# Altium PCB AC_Measurev2_250616.PcbDoc
Units mil, origin at the board's own origin, x right, y up, seen from the top; angles counter-clockwise.
Board outline 3503.94 x 2066.93 mil, 2 copper layers (Top Layer, Bottom Layer); 76 components, 57 nets, 383 pads, 23 vias.
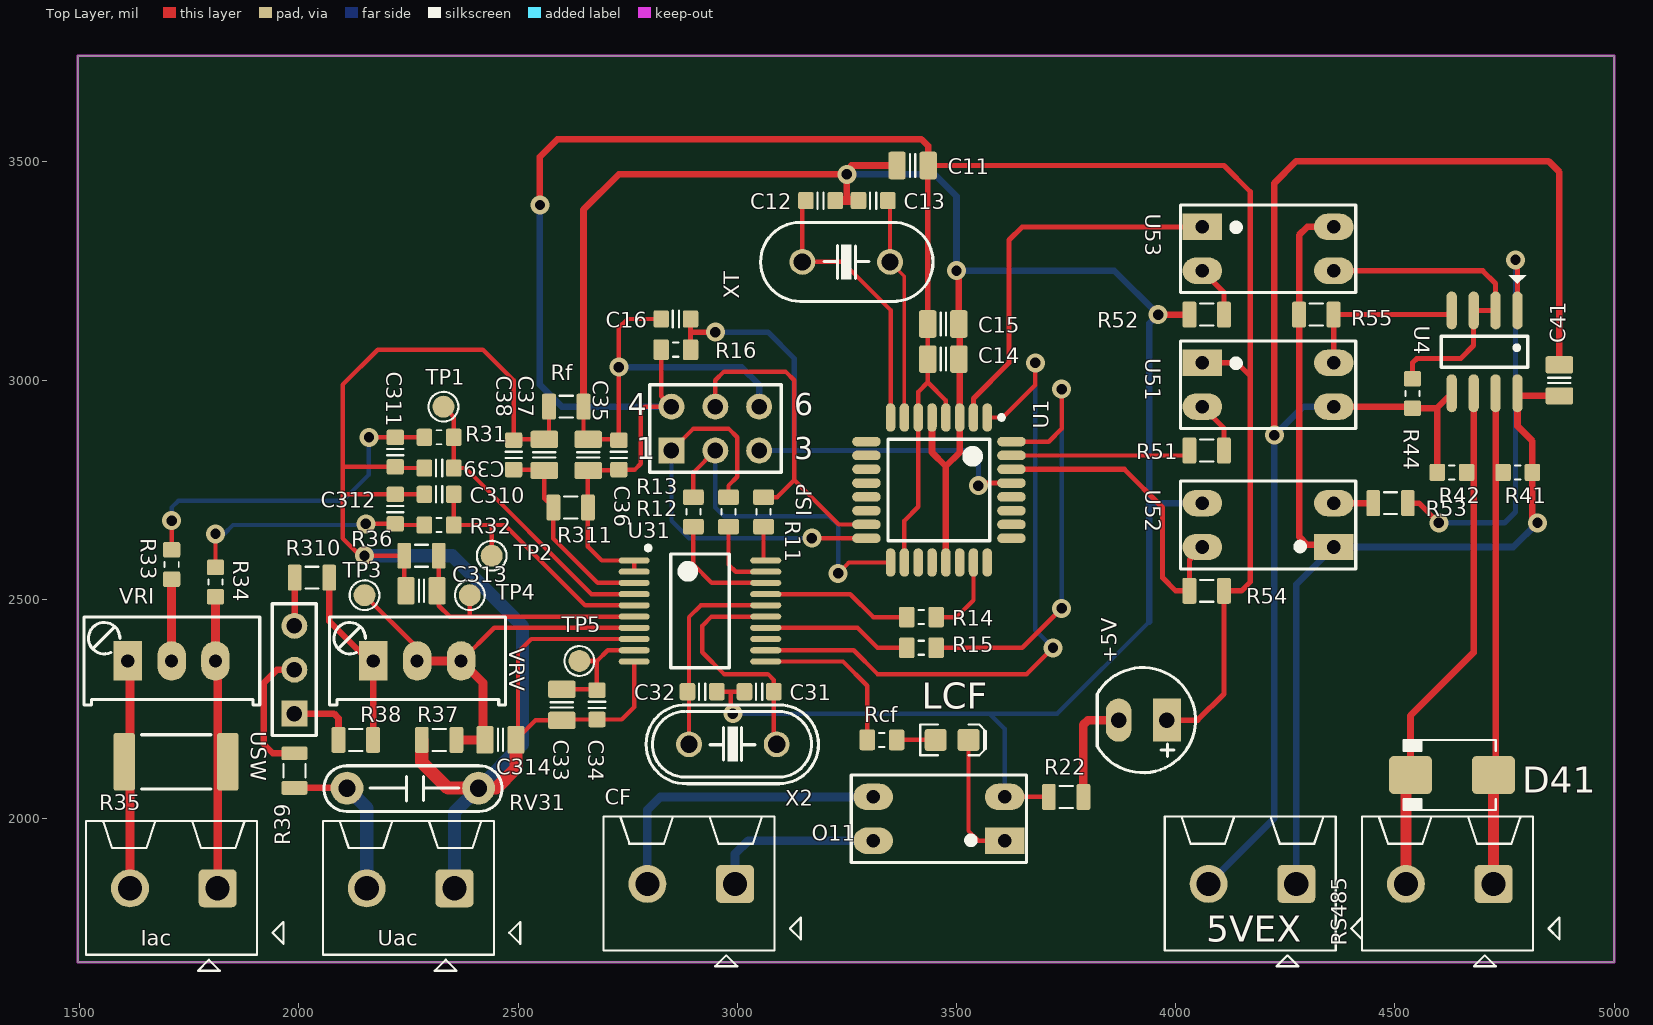
[diagram p0: Top Layer view]
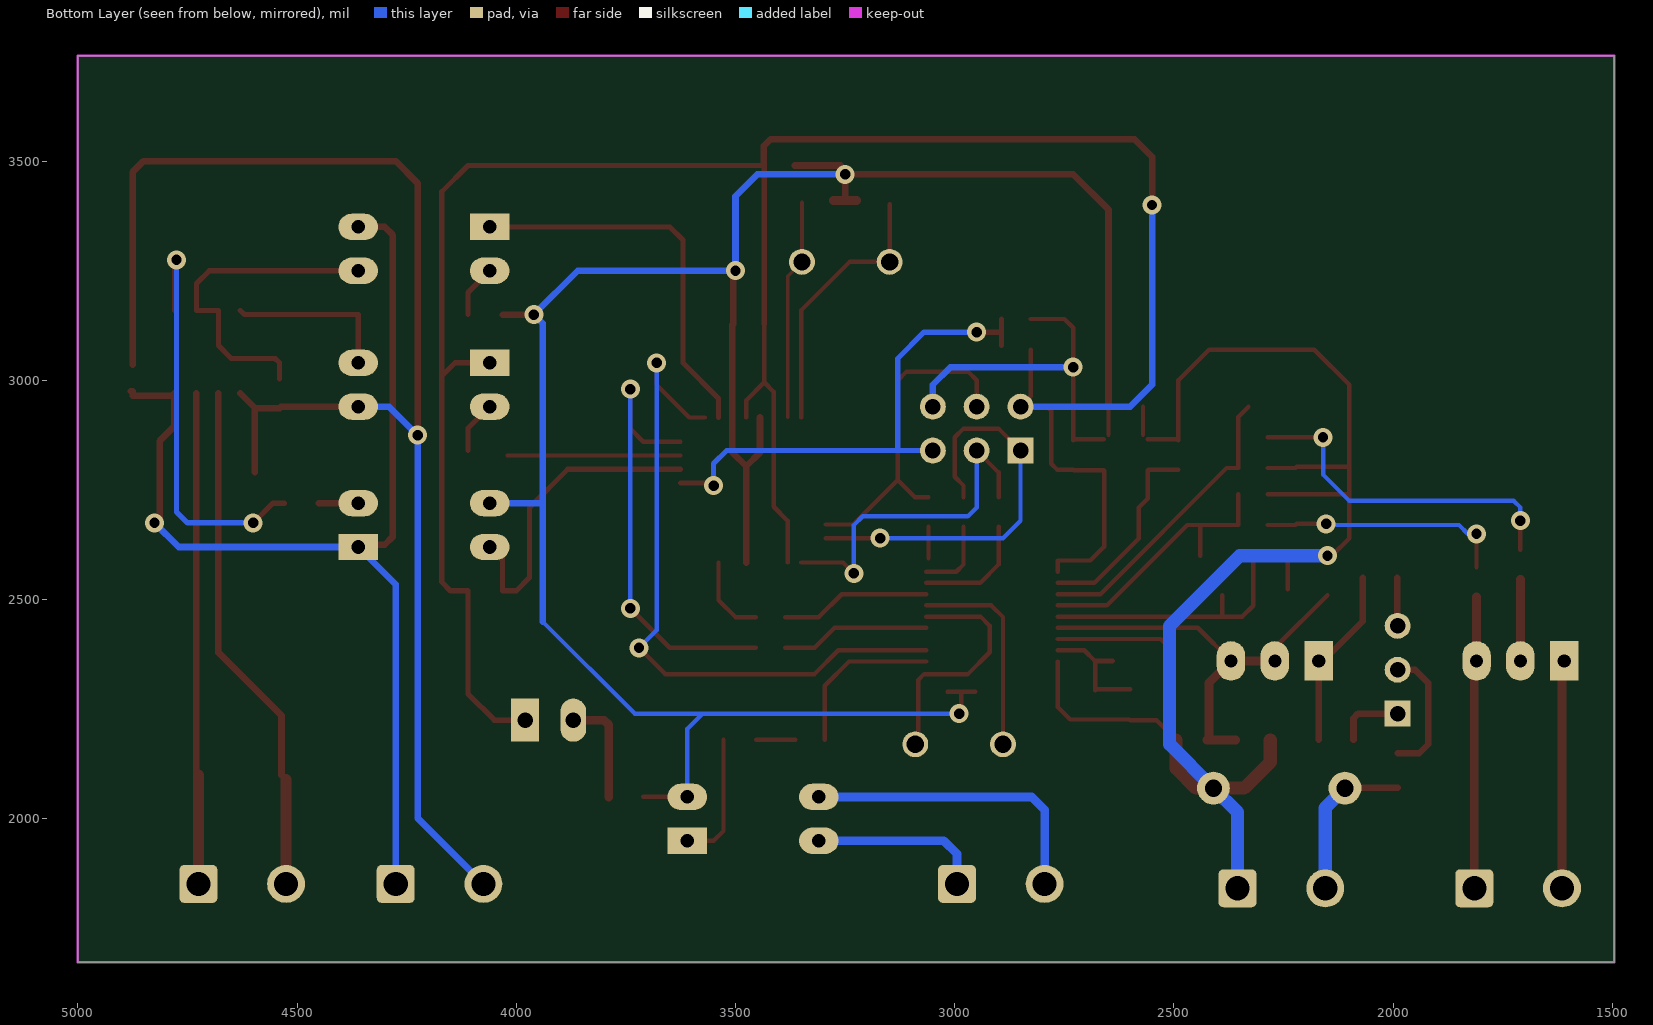
[diagram p1: Bottom Layer view, seen from below]
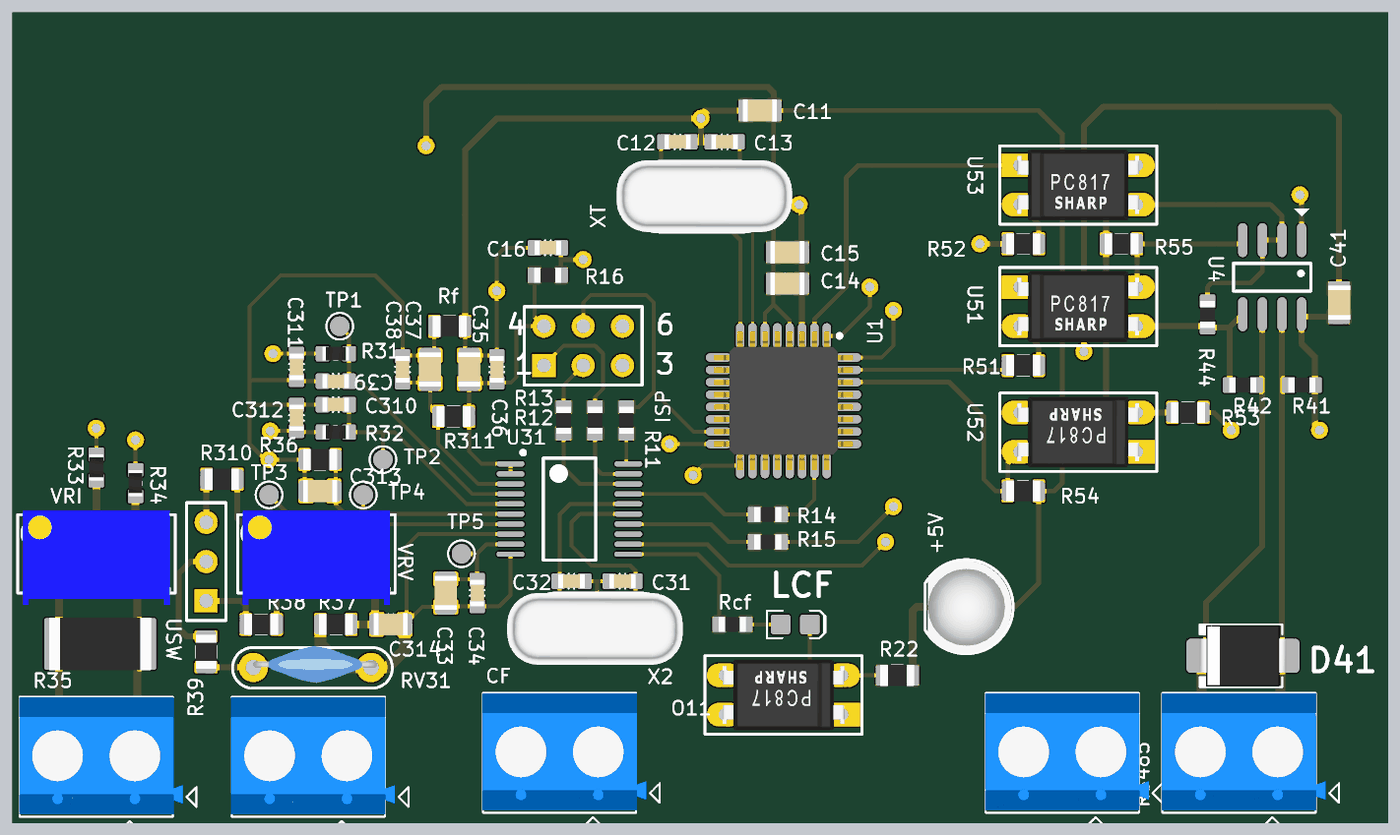
[diagram p2: 3D render of the assembled board from above, using the file's embedded part models]

## Layer stack, top to bottom
Top Solder: solder mask 0.4, Solder Resist, Dk 3.5
Top Layer: signal copper 1.4
Dielectric 1: dielectric 12.6, FR-4, Dk 4.8
Bottom Layer: signal copper 1.4
Bottom Solder: solder mask 0.4, Solder Resist, Dk 3.5

## Board outline
1496.06,1673.23 5000,1673.23 5000,3740.16 1496.06,3740.16

## Design rules (kind name [scope] priority, off if disabled: settings)
Clearance [All] p1: gap=10 except(8: Arc-SMDPad Track-SMDPad SMDPad-SMDPad; 20: Arc-Poly Track-Poly SMDPad-Poly THPad-Poly Via-Poly Fill-Poly Poly-Poly)
PlaneConnect [All] p1: planeconnectstyle=Direct reliefexpansion=20 reliefentries=4 reliefconductorwidth=10 reliefairgap=10
PolygonConnect [All] p1: connectstyle=Direct reliefconductorwidth=10 reliefentries=4 polygonreliefangle="90 Angle" airgapwidth=10
RoutingVias [All] p1: holewidth=31.5 width=47.24 viastyle="Through Hole" minholewidth=19.68 minwidth=43.31 maxholewidth=196.85 maxwidth=196.85
SolderMaskExpansion [All] p1: expansion=4
Width [All] p1: maxlimit=50 minlimit=8 preferedwidth=25
29 further rules are at their usual default settings.

## Components (designator, comment, footprint, x,y, rotation, side; value= is the part's Value field where it differs from the comment)
5VEX "Header 2" 2P_PCB1 4330,1700 r90 top
+5V "Led" "LED 5mm RED" 3925,2225 r180 top
C11 "Cap" CAPC2012N_F#1 3400,3490 r180 top
C12 "CAP NP" CAPC1608N 3190,3410 r0 top
C13 "CAP NP" CAPC1608N 3310,3410 r180 top
C14 "Cap" CAPC2012N_F#1 3470,3048.5 r0 top
C15 "Cap" CAPC2012N_F#1 3470,3128.5 r0 top
C16 "CAP NP" CAPC1608N 2860,3140 r0 top
C31 "CAP NP" CAPC1608N 3050,2290 r0 top
C32 "CAP NP" CAPC1608N 2920,2290 r180 top
C33 "Cap" CAPC2012N_F#2 2600,2260 r270 top
C34 "CAP NP" CAPC1608N 2680,2260 r90 top
C35 "Cap" CAPC2012N_F#2 2660,2830 r90 top
C36 "CAP NP" CAPC1608N 2730,2830 r270 top
C37 "Cap" CAPC2012N_F#2 2560,2830 r90 top
C38 "CAP NP" CAPC1608N 2490,2830 r270 top
C39 "CAP NP" CAPC1608N 2320,2800 r0 top
C41 "100nF/104" CAPC2012N_F#1 4875,3000 r270 top
C310 "CAP NP" CAPC1608N 2320,2740 r0 top
C311 "CAP NP" CAPC1608N 2220,2836.38 r90 top
C312 "CAP NP" CAPC1608N 2220,2706.38 r270 top
C313 "CAP NP" CAPC2012N_F#2 2280,2520 r0 top
C314 "CAP NP" CAPC2012N_F#2 2460,2180 r180 top
CF "Header 2" 2P_PCB1 3050,1700 r90 top
D41 "TVS12V" DO-214AA 4630,2100 r180 top
Iac "Header 2" 2P_PCB1 1870,1690 r90 top
ISP "Header 3X2A" HDR2X3_CEN 2850,2840 r0 top
LCF "Blue" LED-0805-K 3490,2180 r0 top
O11 "Opto" DIP4/W0.3 3610,1950 r90 top
R11 "Res" RESC1608N_F 3060,2700 r90 top
R12 "Res" RESC1608N_F 2980,2700 r90 top
R13 "Res" RESC1608N_F 2900,2700 r90 top
R14 "Res" RESC1608N_F 3420,2460 r0 top
R15 "Res" RESC1608N_F 3420,2390 r0 top
R16 "Res" RESC1608N_F 2860,3070 r180 top
R22 "Res_0805_1k" RESC2012N_F#1 3750,2050 r180 top
R31 "Res" 0603ESDA 2320,2870 r0 top
R32 "Res" 0603ESDA 2320,2670 r0 top
R33 "Res" 0603ESDA 1710,2580 r90 top
R34 "Res" 0603ESDA 1810,2540 r90 top
R35 "0.002R" RESC6332N 1720,2130 r180 top
R36 "Res" RESC2012N_F#2 2280,2600 r0 top
R37 "Res" RESC2012N_F#2 2320,2180 r0 top
R38 "Res" RESC2012N_F#2 2130,2180 r180 top
R39 "Res" RESC2012N_F#2 1990,2110 r270 top
R41 "1k" RESC1608N_ZERO 4780,2790 r0 top
R42 "1k" RESC1608N_ZERO 4630,2790 r0 top
R44 "330R" RESC1608N_ZERO 4540,2970 r90 top
R51 "Res" RESC2012N_F#2 4070.63,2840 r0 top
R52 "Res" RESC2012N_F#2 4070.63,3150 r0 top
R53 "Res" RESC2012N_F#2 4490,2720 r180 top
R54 "Res" RESC2012N_F#2 4070.63,2520 r0 top
R55 "Res" RESC2012N_F#2 4320.63,3150 r180 top
R310 "Res" RESC2012N_F#2 2030,2550 r180 top
R311 "Res" RESC2012N_F#2 2620,2710 r0 top
Rcf "Res" RESC1608N_F 3330,2180 r0 top
Rf "Res" RESC2012N_F#2 2610,2940 r0 top
RS485 "Header 2" 2P_PCB1 4780,1700 r90 top
RV31 "ZOV10D471" CN3 2110,2070 r0 top
TP1 "TESTPOINT" TP-R60 2330,2940 r0 top
TP2 "TESTPOINT" TP-R60 2440,2600 r90 top
TP3 "TESTPOINT" TP-R60 2150,2510 r90 top
TP4 "TESTPOINT" TP-R60 2390,2510 r90 top
TP5 "TESTPOINT" TP-R60 2640,2360 r90 top
U1 "ATmega88PA" 32PIN 3460,2750 r270 top
U4 "MAX485" SO-8 4704.41,3065.04 r270 top
U31 "ADE7753" TSSOP-20 2915,2474 r0 top
U51 "Opto" DIP4/W0.3 4060.63,3040 r270 top
U52 "Opto" DIP4/W0.3 4360.63,2620 r90 top
U53 "Opto" DIP4/W0.3 4060.63,3350 r270 top
Uac "Header 2" 2P_PCB1 2410,1690 r90 top
USW "Header 3" HDR1X3 1990,2240 r90 top
VRI "1K" VR1 1610,2360 r0 top
VRV "100K" VR1 2170,2360 r0 top
X2 "3.5795Mhz" XT2 2990,2170 r0 top
XT "16MHz" XT2 3248.5,3270.16 r180 top

## Footprints (in the part's own frame and the unit in brackets; to place one, negate y for a bottom-side part, rotate by r counter-clockwise, add the part's x,y. Pads: shape width x height; smd on the part's side, far side on the other; paste and mask are expansions set on the pad)
2P_PCB1 [mm]
  rrect25% 2.2x2.2 hole 1.4: 1(3.85,1.397)
  round 2.2 hole 1.4: 2(3.85,6.477)
  silkscreen extent -0.93,-2.41 7.75,9.02, body extent 0.14,-1.54 7.74,9.06, height 10.01
32PIN [mm]
  oval 1.65x0.55 smd: 1(-4.2,2.8) 2(-4.2,2) 3(-4.2,1.2) 4(-4.2,0.4) 5(-4.2,-0.4) 6(-4.2,-1.2) 7(-4.2,-2) 8(-4.2,-2.8) 17(4.2,-2.8) 18(4.2,-2) 19(4.2,-1.2) 20(4.2,-0.4) 21(4.2,0.4) 22(4.2,1.2) 23(4.2,2) 24(4.2,2.8)
  oval 0.55x1.65 smd: 9(-2.8,-4.2) 10(-2,-4.2) 11(-1.2,-4.2) 12(-0.4,-4.2) 13(0.4,-4.2) 14(1.2,-4.2) 15(2,-4.2) 16(2.8,-4.2) 25(2.8,4.2) 26(2,4.2) 27(1.2,4.2) 28(0.4,4.2) 29(-0.4,4.2) 30(-1.2,4.2) 31(-2,4.2) 32(-2.8,4.2)
  silkscreen extent -4.32,-2.95 2.95,3.75, body extent -4.5,-4.5 4.5,4.5, height 1.6
0603ESDA [mm] "Chip ESD suppressor, Body 1.6x0.8mm, 0603, IPC Medium Density"
  round 0.254 on Mech14: 0(0,0)
  rrect25% 0.9x1 smd: 1(-0.85,0) 2(0.85,0)
  Top Layer pour cut-out: -0.4,0.6 0.4,0.6 0.4,-0.6 -0.4,-0.6
  silkscreen extent -0.15,-0.41 0.15,0.41, body extent -0.85,-0.45 0.85,0.45, height 0.79
CAPC1608N [mm] "Chip Capacitor, Body 1.6x0.8mm, 0603, IPC Medium Density"
  round 0.254 on Mech14: 0(0,0)
  rrect25% 0.9x1 smd: 1(-0.85,0) 2(0.85,0)
  Top Layer pour cut-out: -0.4,0.6 0.4,0.6 0.4,-0.6 -0.4,-0.6
  silkscreen extent -0.18,-0.48 0.18,0.48, body extent -0.85,-0.45 0.85,0.45, height 0.89
CAPC2012N_F#1 [mm] "Chip Capacitor, Body 2.0x1.2mm, 0805, IPC Medium Density, for Flex circuits"
  round 0.254 on Mech14: 0(0,0)
  rrect25% 1.2x1.4 on Top Solder: 1(-0.9,0) 1(0.9,0)
  rrect25% 1x1.6 smd paste-1: 1(-0.9,0) 2(0.9,0)
  rrect25% 1x1.4 on Top Paste: 1(-0.9,0) 1(0.9,0)
  Top Layer pour cut-out: -0.4,0.8 0.4,0.8 0.4,-0.8 -0.4,-0.8
  silkscreen extent -0.15,-0.65 0.15,0.65, body extent -1.1,-0.72 1.1,0.73, height 1.34
CAPC2012N_F#2 [mm] "Chip Capacitor, Body 2.0x1.2mm, 0805, IPC Medium Density, for Flex circuits"
  round 0.254 on Mech14: 0(0,0)
  rrect50% 1.2x1.4 on Top Solder: 1(-0.9,0) 1(0.9,0)
  rrect25% 1x1.6 smd paste-1: 1(-0.9,0) 2(0.9,0)
  rrect50% 1x1.4 on Top Paste: 1(-0.9,0) 1(0.9,0)
  Top Layer pour cut-out: -0.4,0.8 0.4,0.8 0.4,-0.8 -0.4,-0.8
  silkscreen extent -0.15,-0.65 0.15,0.65, body extent -1.1,-0.72 1.1,0.73, height 1.34
CN3 [mm] "Cap np W 0.3"
  round 1.9 hole 1: 1(0,0) 2(7.62,0)
  silkscreen extent -1.34,-1.35 8.99,1.3, body extent 0,-1 8,1.4, height 10.65
DIP4/W0.3 [mil] "PC817"
  rect 60x90 hole 31: 1(0,0)
  oval 60x90 hole 31: 2(100,0) 3(100,300) 4(0,300)
  silkscreen extent -50,-50 150,350, body extent -40,-5 140,305, height 169
DO-214AA [mm] "JEDEC DO214 variation AA. SMB"
  round 0.508 on Mech14: 0(0,0)
  rrect25% 2.5x2.2 smd: A(-2.4,0) K(2.4,0)
  silkscreen extent -2.54,-2.03 2.79,2.03, body extent -2.8,-1.97 2.8,1.98, height 2.62
HDR1X3 [mm] "Connector; Header; 3 Position"
  rect 1.5x1.5 hole 0.9: 1(0,0)
  round 1.5 hole 0.9: 2(2.54,0) 3(5.08,0)
  silkscreen extent -1.27,-1.27 6.35,1.27
HDR2X3_CEN [mm] "Connector; Header; 3x2 Position"
  rect 1.5x1.5 hole 0.9: 1(0,0)
  round 1.5 hole 0.9: 2(2.54,0) 3(5.08,0) 4(0,2.54) 5(2.54,2.54) 6(5.08,2.54)
  silkscreen extent -1.27,-1.27 6.35,3.81
"LED 5mm RED" [mm]
  rect 1.6x2.5 hole 0.9: A(-1.397,0)
  oval 1.5x2.5 hole 0.9: K(1.397,0)
  silkscreen extent -3.04,-3.05 2.64,3.04, body extent -2.94,-2.97 2.48,3.05, height 12.31
LED-0805-K [mil]
  round 20 on Mech14: 0(0,0)
  rrect25% 50x50 smd: A(-37.5,0) K(37.5,0)
  Top Layer pour cut-out: -15,30 15,30 15,-30 -15,-30
  silkscreen extent -72,-35 77,35, body extent -39,-25 39,25, height 31
RESC1608N_F [mm] "Chip Resistor, Body 1.6x0.8mm, 0603, IPC Medium Density, for Flex circuits"
  round 0.254 on Mech14: 0(0,0)
  rrect25% 1.1x1 on Top Solder: 1(-0.85,0) 1(0.85,0)
  rrect25% 0.9x1.2 smd paste-1: 1(-0.85,0) 2(0.85,0)
  rrect25% 0.9x1 on Top Paste: 1(-0.85,0) 1(0.85,0)
  Top Layer pour cut-out: -0.4,0.6 0.4,0.6 0.4,-0.6 -0.4,-0.6
  silkscreen extent -0.15,-0.41 0.15,0.41, body extent -0.87,-0.47 0.88,0.48, height 0.54
RESC1608N_ZERO [mm] "Chip Resistor, Body 1.6x0.8mm, 0603, IPC Medium Density"
  round 0.254 on Mech14: 0(0,0)
  rrect25% 0.9x1 smd: 1(-0.85,0) 2(0.85,0)
  Top Layer pour cut-out: -0.4,0.6 0.4,0.6 0.4,-0.6 -0.4,-0.6
  silkscreen extent -0.15,-0.41 0.15,0.41, body extent -0.87,-0.47 0.88,0.48, height 0.54
RESC2012N_F#1 [mm] "Chip Resistor, Body 2.0x1.2mm, 0805, IPC Medium Density"
  round 0.254 on Mech14: 0(0,0)
  rrect25% 1x1.3 on Top Solder: 1(-1,0) 1(1,0)
  rrect25% 0.8x1.5 smd paste-1: 1(-1,0) 2(1,0)
  rrect25% 0.8x1.3 on Top Paste: 1(-1,0) 1(1,0)
  Top Layer pour cut-out: -0.6,0.75 0.6,0.75 0.6,-0.75 -0.6,-0.75
  silkscreen extent -0.38,-0.64 0.38,0.64, body extent -1.1,-0.67 1.1,0.68, height 0.69
RESC2012N_F#2 [mm] "Chip Resistor, Body 2.0x1.2mm, 0805, IPC Medium Density"
  round 0.254 on Mech14: 0(0,0)
  rrect50% 1x1.3 on Top Solder: 1(-1,0) 1(1,0)
  rrect25% 0.8x1.5 smd paste-1: 1(-1,0) 2(1,0)
  rrect50% 0.8x1.3 on Top Paste: 1(-1,0) 1(1,0)
  Top Layer pour cut-out: -0.6,0.75 0.6,0.75 0.6,-0.75 -0.6,-0.75
  silkscreen extent -0.38,-0.64 0.38,0.64, body extent -1.1,-0.67 1.1,0.68, height 0.69
RESC6332N [mm] "Chip Resistor, Body 6.3x3.2mm, 2512, IPC Medium Density"
  round 1 on Mech14: 0(0,0)
  rrect25% 1.25x3.35 smd: 1(-3,0) 2(3,0)
  silkscreen extent -2,-1.58 2,1.58, body extent -3.3,-1.7 3.3,1.7, height 0.69
SO-8 [mm] "8-Pin Small Outline Integrated Circuit 1.27 mm Pitch, IPC Medium Density"
  oval 2.2x0.6 smd: 1(-2.4,1.905) 2(-2.4,0.635) 3(-2.4,-0.635) 4(-2.4,-1.905) 5(2.4,-1.905) 6(2.4,-0.635) 7(2.4,0.635) 8(2.4,1.905)
  silkscreen extent -4.45,-2.5 0.9,2.5, body extent -1.95,-2.45 1.95,2.45, height 1.75
TP-R60 [mil]
  round 50 smd: 1(0,0)
  silkscreen extent -34,-34 34,34, body extent -30,-30 30,30, height 10
TSSOP-20 [mm] "TSOP, 20-Leads, Body 6.5x4.4mm, Pitch 0.65mm, IPC Low Density"
  oval 1.8x0.35 smd: 1(-3.81,2.925) 2(-3.81,2.275) 3(-3.81,1.625) 4(-3.81,0.975) 5(-3.81,0.325) 6(-3.81,-0.325) 7(-3.81,-0.975) 8(-3.81,-1.625) 9(-3.81,-2.275) 10(-3.81,-2.925) 11(3.81,-2.925) 12(3.81,-2.275) 13(3.81,-1.625) 14(3.81,-0.975) 15(3.81,-0.325) 16(3.81,0.325) 17(3.81,0.975) 18(3.81,1.625) 19(3.81,2.275) 20(3.81,2.925)
  silkscreen extent -3.12,-3.3 1.7,3.77, body extent -2.25,-3.3 2.25,3.3, height 1.2
VR1 [mil] "Variable Resistor"
  rect 65x90 hole 30: 1(0,0)
  oval 65x90 hole 30: 2(100,0) 3(200,0)
  silkscreen extent -100,-100 301,100, body extent -88,-130 288,110, height 455
XT2 [mm] "Footpin for Crystal 2 pin"
  round 1.5 hole 1: 1(-2.54,0) 2(2.54,0)
  silkscreen extent -5.03,-2.29 4.96,2.29, body extent -5.93,-2.36 5.42,2.29, height 3.5

## Part data
5VEX CF Iac RS485 Uac: "Header, 2-Pin"
C41: library part "CAP NP"
D41: library part Tranzorb, "Transient Voltage Suppression (TVS) Diode"
ISP: "Header, 3-Pin, Dual row"
LCF: library part LED_SMD_Blue_0805_100mcd, "LED 0805 SMD Blue 100mcd 470nm"
R22: library part Res
R35: library part R, "Resistor 1/4W"
R41 R42 R44: library part Res, "Tro dan"
RV31: library part "Res Varistor", "Varistor (Voltage-Sensitive Resistor)"
TP1 TP2 TP3 TP4 TP5: "SMD test pin"
U1: library part ATmega48/168/328, "ATmega48/168/328"
U4: "RS232 - RS485 (Same sn75176)"
U31: "Single-Phase Multifunction Metering IC with di/dt Sensor Interface"
USW: "Header, 3-Pin"
VRI VRV: library part VR, "Var Resistor"
X2: library part XT2, "Crystal For all Crystal 2pin."
XT: library part Crystal

## Via types
v1: diameter 43.31, hole 23.62, Top Layer to Bottom Layer, 23 vias

## Nets (pads, with @x,y where several pads share a name; then routed paths per layer and width w, separated by ;. In a path a pad name is that pad's centre, name@x,y a point inside that pad or via, vN(x,y) a via of type N, cw(c..) or ccw(c..) an arc to the next point about the centre after c; other vN are vias at no path point)
+5V: +5V.A C11.1@3435.43,3490 C14.1@3434.57,3048.5 C15.1@3434.57,3128.5 C35.1@2660,2794.57 C36.2 ISP.4 R16.2 R54.2 R311.2 U1.4 U1.6 U1.18 U31.1 U31.2 U51.1 | length 5826.3
  Top Layer w10: U31.2 U31.1 2690.84,2589.16 2659.37,2620.63 R311.2 2659.37,2793.94 2660,2794.57 2728.03,2794.57 C36.2 2766.54,2796.54 2780,2810 2780,2930 2790,2940 ISP.4 2826.54,2963.46 R16.2 ; U1.18 3381.26,2680 3412.76,2711.5 U1.6 3412.76,2973.62 3434.57,2995.43 ; C15.1@3434.57,3128.5 3434.57,3048.5 3434.57,2995.43 ; U1.4 3475.75,2954.25 3434.57,2995.43
  Top Layer w12: C15.1@3434.57,3128.5 C11.1@3434.57,3490 ; C11.1@3435.43,3490 4110,3490 4170,3430 4170,3010 ; +5V.A 4050,2225 4110,2285 R54.2 4150,2520 4170,2540 4170,3010 ; U51.1 4140,3040 4170,3010
  Top Layer w15: v1(2550,3400) 2550,3510 2590,3550 3420,3550 3435.43,3534.57 C11.1@3435.43,3490
  Bottom Layer w15: v1(2550,3400) 2550,2990 2600,2940 ISP.4
+VIN: 
ADE-CLK: ISP.2 R13.2 U1.17 | length 793.8
  Top Layer w10: R13.2 2900,2790 ISP.2 ; v1(3230,2560) 3254.65,2584.65 U1.17
  Bottom Layer w10: ISP.2 2950,2710 2970,2690 3210,2690 3230,2670 v1(3230,2560)
ADE-CS: R14.2 U1.23 | length 187.2
  Top Layer w10: R14.2 3500,2460 3538.74,2498.74 U1.23
ADE-DIN: ISP.5 R11.2 U1.15 | length 776.8
  Top Layer w10: ISP.5 2950,3000 2970,3020 3110,3020 3130,3000 3130,2772.52 ; R11.2 3090.95,2733.46 3130,2772.52 ; U1.15 3231.26,2671.26 3130,2772.52
ADE-DOUT: ISP.1 R12.2 U1.16 | length 945.1
  Top Layer w10: ISP.1 2900,2890 2980,2890 3000,2870 3000,2780 2980,2760 R12.2 ; v1(3170,2640) 3170.24,2639.76 U1.16
  Bottom Layer w10: ISP.1 2850,2680 2890,2640 v1(3170,2640)
ADE_IRQ: R15.2 U1.32 | length 1040.8
  Top Layer w10: R15.2 3650,2390 v1(3740,2480) ; U1.32 3710.24,2860.24 3740,2890 v1(3740,2980)
  Bottom Layer w10: v1(3740,2480) v1(3740,2980)
ADE_ZC: U1.1 U31.12 | length 1559.7
  Top Layer w10: U31.12 3265.57,2384.43 3320,2330 3660,2330 v1(3720,2390) ; U1.1 3605.35,2915.35 3680,2990 v1(3680,3040)
  Bottom Layer w10: v1(3680,3040) 3680,2430 v1(3720,2390)
AGND: C33.2 C34.1 C37.2 C38.1 C39.1 C310.1 C311.1 C312.1 C313.1@2244.57,2520 C314.1@2495.43,2180 R36.1@2240.63,2600 R37.1@2280.63,2180 Rf.1@2570.63,2940 RV31.2 U31.8 U31.10 Uac.1 | length 4013.3
  Top Layer w10: 2100.16,2739.84 C312.1 ; 2102.91,2802.91 C311.1 ; C312.1@2220.16,2740 C310.1 ; C311.1@2222.91,2800 C39.1 ; C313.1@2240.63,2523.94 2240.63,2600 v1(2150,2600) 2140,2600 2100,2640 2100,2990 2180,3070 2420,3070 2490,3000 C38.1 2491.97,2865.43 C37.2 ; C314.1@2495.43,2180 C314.1@2500,2184.57 ; C37.2@2570.63,2876.06 Rf.1@2570.63,2940 ; U31.10 2765,2255 2736.54,2226.54 C34.1 2601.97,2226.54 C33.2 2540,2224.57 C314.1@2500,2184.57 ; U31.8 2530.02,2410.02 2500,2380 C314.1@2500,2184.57
  Top Layer w30: R37.1@2280.63,2180 2280.63,2129.37 2340,2070 RV31.2 2450,2070 2495.43,2115.43 C314.1@2495.43,2180
  Bottom Layer w30: v1(2150,2600) 2350,2600 2510,2440 2510,2170 RV31.2 2355,2015 Uac.1
AREF: U1.20
AVDD: C37.1@2560,2794.57 C38.2 R311.1@2580.63,2710 U31.3 | length 460.9
  Top Layer w10: C38.2 2558.03,2796.54 2560,2794.57 2560,2730.63 2580.63,2710 2580.63,2639.37 2682.02,2537.98 U31.3
CF: Rcf.1@3296.54,2180 U31.11 | length 377.9
  Top Layer w10: U31.11 3241.16,2358.84 3296.54,2303.46 Rcf.1@3296.54,2180
CTA: Iac.2 R35.2 VRI.1 | length 520.5
  Top Layer w20: VRI.1 1615,2355 Iac.2
CTB: Iac.1 R34.1 R35.1 VRI.3 | length 667
  Top Layer w20: R34.1 VRI.3 1815,2355 Iac.1
EX_+5V: 5VEX.1 C41.2 R41.2 R55.2 U4.8 U52.1 U53.4 | length 2571.8
  Top Layer w15: U52.1 4355.63,2625 4300,2625 4281.26,2643.74 R55.2 4281.26,3331.26 4300,3350 U53.4 ; v1(4825,2675) 4813.46,2686.54 R41.2 4813.46,2861.54 4779.41,2895.59 U4.8 4785.39,2964.57 C41.2 ; C41.2@4875,2975.47 C41.2@4879.41,2975.47
  Bottom Layer w15: 5VEX.1 4275,2534.37 U52.1 4770,2620 v1(4825,2675)
EX_GND: 5VEX.2 C41.1@4875,3035.43 R42.1 R44.1 U4.5 U51.3 | length 3373.4
  Top Layer w15: v1(4225,2875) 4225,3450 4275,3500 4850,3500 4875,3475 C41.1@4875,3035.43 ; U51.3 4536.54,2940 R44.1 4595.39,2936.54 U4.5 ; R42.1 4596.54,2935.39
  Bottom Layer w15: 5VEX.2 4225,2001.56 v1(4225,2875) 4290,2940 U51.3
GND: C11.2 C12.2 C13.2 C14.2 C15.2 C16.1 C31.1 C32.1 C35.2 C36.1 ISP.6 O11.2 R22.2 R52.1@4031.26,3150 Rf.2 U1.3 U1.5 U1.21 U52.3 | length 6286.3
  Top Layer w10: C35.2@2649.37,2876.06 Rf.2 ; C35.2 2728.03,2865.43 C36.1 v1(2730,3030) 2730,3120 2750,3140 C16.1 ; C32.1 2985,2290 ; v1(2990,2240) 2985,2245 2985,2290 ; C31.1 2985,2290 ; O11.2 R22.2
  Top Layer w15: Rf.2 2649.37,3389.37 2730,3470 v1(3250,3470) 3250,3410 ; 3260,3490 C11.2 ; U1.5 3444.25,2835.75 3475.75,2804.25 ; U1.21 3475.75,2804.25 ; v1(3500,3250) 3505.43,3244.57 C15.2 ; C15.2@3507.24,3126.69 U1.3 3507.24,2835.75 3475.75,2804.25 ; v1(3960,3150) R52.1@4031.26,3150
  Top Layer w20: C12.2 3250,3410 C13.2
  Bottom Layer w10: v1(2990,2240) 3575,2240 ; O11.2 3610,2205 3575,2240 ; 3940,2450 3730,2240 3575,2240
  Bottom Layer w15: v1(2730,3030) 3010,3030 3050,2990 ISP.6 ; v1(3250,3470) 3450,3470 3500,3420 v1(3500,3250) 3860,3250 v1(3960,3150) 3940,3130 3940,2720 ; 3940,2450 3940,2720 ; U52.3 3940,2720
I1N: C312.2 R32.1 R34.2 | length 563.8
  Top Layer w10: R34.2 v1(1810,2650) ; v1(2152.91,2672.91) C312.2 2222.91,2670 R32.1
  Bottom Layer w10: v1(1810,2650) 1830,2650 1850,2670 2150,2670 v1(2152.91,2672.91)
ISO_485: R44.2 U4.2 U4.3 U53.3 | length 764.4
  Top Layer w12: U53.3 4700,3250 4729.41,3220.59 U4.2 U4.3 4679.41,3079.41 4650,3050 4550,3050 4540,3040 R44.2
ISO_RX: R53.1@4529.37,2720 U4.1 | length 966.9
  Top Layer w12: R53.1@4529.37,2720 4555,2720 v1(4600,2675) ; v1(4775,3275) 4779.41,3270.59 U4.1
  Bottom Layer w12: v1(4600,2675) 4750,2675 4775,2700 v1(4775,3275)
ISO_TX: R55.1@4360,3150 U4.4 U51.4 | length 382.7
  Top Layer w12: R55.1@4360,3150 4619.88,3150 U4.4 ; U51.4 R55.1@4360.63,3149.37
LIVE_IN: R39.2 RV31.1 Uac.2 | length 367.3
  Top Layer w15: R39.2 2109.37,2070.63 RV31.1
  Bottom Layer w30: RV31.1 2155,2025 Uac.2
MCU_RX: R54.1@4031.26,2520 U1.30 U52.4 | length 726.6
  Top Layer w12: U1.30 3882.76,2797.24 3970,2710 3970,2550 4000,2520 4031.26,2520 4031.26,2590.63 U52.4
MCU_TX: R51.1@4031.26,2840 U1.31 | length 394.6
  Top Layer w10: U1.31 R51.1@4020,2828.74
Net+5V_2: +5V.K R22.1@3789.37,2050 | length 249.4
  Top Layer w20: R22.1@3789.37,2050 3789.37,2214.37 3800,2225 +5V.K
NetC21_1: 
NetC311_2: C311.2 R31.1 R33.2 | length 789.1
  Top Layer w10: R33.2 v1(1710,2680) ; v1(2160,2870) R31.1
  Bottom Layer w10: v1(1710,2680) 1710,2710 1725,2725 2100,2725 2160,2785 v1(2160,2870)
NetCF_1: CF.1 O11.4 | length 395.9
  Bottom Layer w20: CF.1 2995,1920 3025,1950 O11.4
NetCF_2: CF.2 O11.3 | length 695.9
  Bottom Layer w20: CF.2 2795,2020 2825,2050 O11.3
NetLCF_A: LCF.A Rcf.2 | length 89
  Top Layer w10: Rcf.2 LCF.A
NetLCF_K: LCF.K O11.1 | length 299.3
  Top Layer w10: LCF.K 3527.5,1972.5 3550,1950 O11.1
NetR11_1: R11.1@3060,2666.54 U31.20 | length 72.4
  Top Layer w10: U31.20@3060,2594.16 R11.1@3060,2666.54
NetR12_1: R12.1@2980,2666.54 U31.19 | length 178.3
  Top Layer w10: R12.1@2980,2666.54 2980,2580 2996.43,2563.57 U31.19
NetR13_1: R13.1@2900,2666.54 U31.18 | length 268.9
  Top Layer w10: R13.1@2900,2666.54 2900,2580 2942.02,2537.98 U31.18
NetR14_1: R14.1@3386.54,2460 U31.17 | length 343.2
  Top Layer w10: U31.17 3257.61,2512.39 3310,2460 R14.1@3386.54,2460
NetR15_1: R15.1@3386.54,2390 U31.14 | length 340.4
  Top Layer w10: U31.14 3274.39,2435.61 3320,2390 R15.1@3386.54,2390
NetR33_1: R33.1 VRI.2 | length 186.5
  Top Layer w20: VRI.2 R33.1
NetR38_1: R38.1@2169.37,2180 R310.1@2069.37,2550 VRV.1 | length 416.5
  Top Layer w15: R310.1@2069.37,2550 2069.37,2450.63 2160.63,2359.37 2169.37,2359.37 R38.1@2169.37,2180
NetR38_2: R38.2 USW.1 | length 154.4
  Top Layer w15: USW.1 2080,2240 2090.63,2229.37 R38.2
NetR39_1: R39.1@1990,2149.37 USW.2 | length 301
  Top Layer w15: R39.1@1990,2149.37 1940.63,2149.37 1920,2170 1920,2310 1950,2340 USW.2
NetR51_2: R51.2 U51.2 | length 120.4
  Top Layer w12: U51.2 4110,2890.63 R51.2
NetR52_2: R52.2 U53.2 | length 120.4
  Top Layer w12: U53.2 4110,3200.63 R52.2
NetR53_2: R53.2 U52.2 | length 90
  Top Layer w15: U52.2 R53.2
NetR310_2: R310.2 USW.3 | length 109.4
  Top Layer w15: USW.3@1990.63,2440.63 R310.2
REF: C33.1@2600,2295.43 C34.2 TP5.1 U31.9 | length 282.5
  Top Layer w10: C33.1@2600,2295.43 2678.03,2295.43 C34.2 2680,2360 2704.43,2384.43 U31.9
  Top Layer w12: TP5.1 2680,2360
RESET: C16.2 ISP.3 R16.1@2893.46,3070 U1.29 | length 1171.5
  Top Layer w12: R16.1@2893.46,3080 2893.46,3110 ; C16.2 2893.46,3110 ; v1(2950,3110) 2893.46,3110 ; v1(3550,2760) 3555.75,2765.75 U1.29
  Bottom Layer w12: v1(2950,3110) 3070,3110 3130,3050 3130,2840 ; ISP.3 3130,2840 ; v1(3550,2760) 3550,2810 3520,2840 3130,2840
RS485A: D41.K R42.2 RS485.2 U4.6 | length 1168.1
  Top Layer w15: D41.K 4535.51,2235.51 4679.41,2379.41 U4.6
  Top Layer w25: RS485.2 D41.K@4525,2089.49
RS485B: D41.A R41.1 RS485.1 U4.7 | length 1121.2
  Top Layer w15: D41.A 4729.41,2104.92 U4.7
  Top Layer w25: D41.A 4725,2099.48 RS485.1
RS485D: U1.2 U53.1 | length 891.4
  Top Layer w12: U1.2 3538.74,2958.74 3620,3040 3620,3320 3650,3350 U53.1
V1N: C310.2 R32.2 TP2.1 U31.5 | length 627.4
  Top Layer w10: C310.2 R32.2 2440,2670 ; TP2.1 2440,2670 ; U31.5 2653.2,2486.8 2470,2670 2440,2670
V1P: C39.2 R31.2 TP1.1 U31.4 | length 680.4
  Top Layer w10: TP1.1 2353.46,2916.54 R31.2 C39.2 2380,2800 2667.61,2512.39 U31.4
V2N: C313.2 R36.2 TP4.1 U31.6 | length 618.7
  Top Layer w10: R36.2 2319.37,2486.06 2344.23,2461.2 2390,2461.2 ; TP4.1 2390,2461.2 ; U31.6 2390,2461.2
V2P: C314.2 R37.2 TP3.1 U31.7 VRV.2 VRV.3 | length 993.8
  Top Layer w10: TP3.1 2270,2390 VRV.2 ; VRV.3 2445.61,2435.61 U31.7
  Top Layer w20: VRV.2 VRV.3 2420,2310 2420,2184.57 C314.2 R37.2
X2I: C31.2 U31.15 X2.2 | length 552.8
  Top Layer w10: U31.15 2941.2,2461.2 2920,2440 2920,2380 2970,2330 3070,2330 3083.46,2316.54 C31.2 3083.46,2176.54 X2.2
X2O: C32.2 U31.16 X2.1 | length 476.1
  Top Layer w10: X2.1 2890,2460 2916.8,2486.8 U31.16
XTAL1: C12.1 U1.8 XT.2 | length 623.5
  Top Layer w10: C12.1@3148.5,3401.97 XT.2 3239.84,3270.16 3349.76,3160.24 U1.8
XTAL2: C13.1 U1.7 XT.1 | length 503.2
  Top Layer w8: XT.1 3381.26,3237.4 U1.7
  Top Layer w10: XT.1 C13.1@3348.5,3404.96
pads on no net: C11.0 C11.1@3364.57,3490 C11.1@3364.57,3490.01 C11.1@3435.43,3490 C11.1@3435.44,3490.01 C12.0 C13.0 C14.0 C14.1@3434.56,3048.5 C14.1@3434.57,3048.5 C14.1@3505.43,3048.5 C15.0 C15.1@3434.56,3128.5 C15.1@3434.57,3128.5 C15.1@3505.43,3128.5 C16.0 C31.0 C32.0 C33.0 C33.1@2599.99,2224.57 C33.1@2599.99,2295.44 C33.1@2600,2224.57 C33.1@2600,2295.43 C34.0 C35.0 C35.1@2660,2794.57 C35.1@2660,2865.43 C35.1@2660.01,2794.56 C35.1@2660.01,2865.43 C36.0 C37.0 C37.1@2560,2794.57 C37.1@2560,2865.43 C37.1@2560.01,2794.56 C37.1@2560.01,2865.43 C38.0 C39.0 C41.0 C41.1@4874.99,2964.57 C41.1@4874.99,3035.44 C41.1@4875,2964.57 C41.1@4875,3035.43 C310.0 C311.0 C312.0 C313.0 C313.1@2244.56,2519.99 C313.1@2244.57,2520 C313.1@2315.43,2519.99 C313.1@2315.43,2520 C314.0 C314.1@2424.57,2180 C314.1@2424.57,2180.01 C314.1@2495.43,2180 C314.1@2495.44,2180.01 D41.0 LCF.0 R11.0 R11.1@3059.99,2666.54 R11.1@3059.99,2733.47 R11.1@3060,2666.54 R11.1@3060,2733.46 R12.0 R12.1@2979.99,2666.54 R12.1@2979.99,2733.47 R12.1@2980,2666.54 R12.1@2980,2733.46 R13.0 R13.1@2899.99,2666.54 R13.1@2899.99,2733.47 R13.1@2900,2666.54 R13.1@2900,2733.46 R14.0 R14.1@3386.54,2460 R14.1@3386.54,2460.01 R14.1@3453.46,2460 R14.1@3453.47,2460.01 R15.0 R15.1@3386.54,2390 R15.1@3386.54,2390.01 R15.1@3453.46,2390 R15.1@3453.47,2390.01 R16.0 R16.1@2826.53,3069.99 R16.1@2826.54,3070 R16.1@2893.46,3069.99 R16.1@2893.46,3070 R22.0 R22.1@3710.63,2050 R22.1@3710.63,2050.01 R22.1@3789.37,2050 R22.1@3789.37,2050.01 R31.0 R32.0 R33.0 R34.0 R35.0 R36.0 R36.1@2240.63,2599.99 R36.1@2240.63,2600 R36.1@2319.37,2599.99 R36.1@2319.37,2600 R37.0 R37.1@2280.63,2179.99 R37.1@2280.63,2180 R37.1@2359.37,2179.99 R37.1@2359.37,2180 R38.0 R38.1@2090.63,2180 R38.1@2090.63,2180.01 R38.1@2169.37,2180 R38.1@2169.37,2180.01 R39.0 R39.1@1989.99,2070.63 R39.1@1989.99,2149.37 R39.1@1990,2070.63 R39.1@1990,2149.37 R41.0 R42.0 R44.0 R51.0 R51.1@4031.26,2839.99 R51.1@4031.26,2840 R51.1@4110,2839.99 R51.1@4110,2840 R52.0 R52.1@4031.26,3149.99 R52.1@4031.26,3150 R52.1@4110,3149.99 R52.1@4110,3150 R53.0 R53.1@4450.63,2720 R53.1@4450.63,2720.01 R53.1@4529.37,2720 R53.1@4529.37,2720.01 R54.0 R54.1@4031.26,2519.99 R54.1@4031.26,2520 R54.1@4110,2519.99 R54.1@4110,2520 R55.0 R55.1@4281.26,3150 R55.1@4281.26,3150.01 R55.1@4360,3150 R55.1@4360,3150.01 R310.0 R310.1@1990.63,2550 R310.1@1990.63,2550.01 R310.1@2069.37,2550 R310.1@2069.37,2550.01 R311.0 R311.1@2580.63,2709.99 R311.1@2580.63,2710 R311.1@2659.37,2709.99 R311.1@2659.37,2710 Rcf.0 Rcf.1@3296.54,2180 Rcf.1@3296.54,2180.01 Rcf.1@3363.46,2180 Rcf.1@3363.47,2180.01 Rf.0 Rf.1@2570.63,2939.99 Rf.1@2570.63,2940 Rf.1@2649.37,2939.99 Rf.1@2649.37,2940 U1.9 U1.10 U1.11 U1.12 U1.13 U1.14 U1.19 U1.22 U1.24 U1.25 U1.26 U1.27 U1.28 U31.13

## Keep-outs
Keep-Out Layer:
  the board outline again, w5.91

## Dimensions
1498.9,1515.75 to 5000,1496.06 on Top Overlay
1377.95,3740.16 to 1338.58,1574.8 on Top Overlay

## Text inside footprints (layer, text, board x,y; h text height)
ISP: Top Overlay "4" at 2750,2920 h50; Top Overlay "1" at 2770,2820 h50; Top Overlay "3" at 3130,2820 h50; Top Overlay "6" at 3130,2920 h50